# Altium PCB connect.PcbDoc
Units mil, origin at the board's own origin, x right, y up, seen from the top; angles counter-clockwise.
Board outline 322.06 x 417.22 mil, 2 copper layers (Top Layer, Bottom Layer); 2 components, 15 nets, 10 pads, 0 vias.
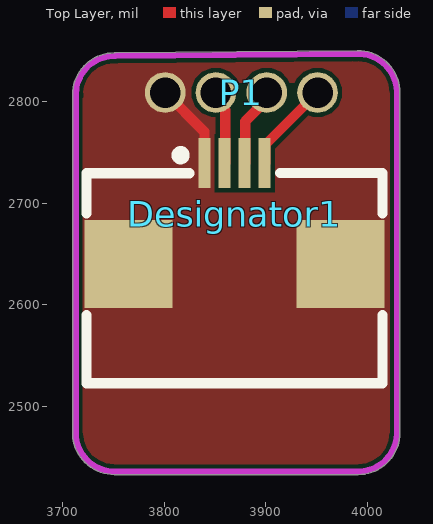
[diagram p0: Top Layer view]
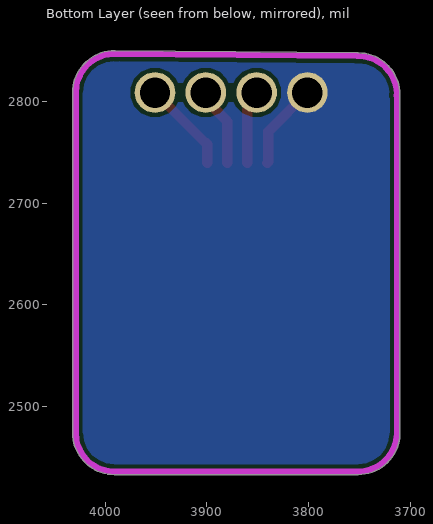
[diagram p1: Bottom Layer view, seen from below]

## Layer stack, top to bottom
Top Solder: solder mask 0.4, Solder Resist, Dk 3.5
Top Layer: signal copper 1.4
Dielectric 1: dielectric 12.6, FR-4, Dk 4.8
Bottom Layer: signal copper 1.4
Bottom Solder: solder mask 0.4, Solder Resist, Dk 3.5

## Board outline
3710.2,2469.85 cw(c3712.99,2471) 3709.97,2471 3709.97,2805 cw(c3712.98,2805) 3710.14,2806 cw(c3712.99,2807) 3709.97,2807 cw(c3751,2807) 3751,2848.03 cw(c3751,2845.01) 3751.49,2847.99 cw(c3751.97,2845.02) 3751.95,2848.03 3990.68,2850.19 cw(c3990.7,2847.95) 3990.71,2850.19 cw(c3990.74,2847.25) 3990.74,2850.19 cw(c3990.74,2808.9) 4032.03,2808.9 4032.03,2474 cw(c3991,2474) 3991,2432.97 3751,2432.97 cw(c3751,2474) 3710.21,2469.52 cw(c3713.22,2469.85)

## Design rules (kind name [scope] priority, off if disabled: settings)
Clearance Clearance_Logo [InNetClass('Logo')] p1: gap=8 ignorepadtopadclearanceinfootprint=FALSE
Clearance [All] p2: gap=4 ignorepadtopadclearanceinfootprint=FALSE except(0: Arc-Hole Track-Hole SMDPad-Hole THPad-Hole Via-Hole Fill-Hole Poly-Hole Region-Hole Text-Hole)
ComponentClearance [All] p1: gap=0 collisioncheckmode=3 verticalgap=0 showdistances=FALSE
DiffPairsRouting [All] p1: maxlimit=9 minlimit=9 mostfreqgap=9 toplayer_minwidth=15 toplayer_maxwidth=15 toplayer_prefwidth=15 bottomlayer_minwidth=15 bottomlayer_maxwidth=15 bottomlayer_prefwidth=15 maxuncoupledlength=500
FanoutControl Fanout_BGA [All] p1: bgadir=Out bgaviamode=Centered fanoutstyle=Auto fanoutdirection=Alternating viagrid=1 // Fanout_BGA (Default Rule)
HoleSize [All] p1: absolutevalues=TRUE maxlimit=10000 minlimit=8 maxpercent=80.000 minpercent=20.000
MinimumSolderMaskSliver [All] p1 off: minsoldermaskwidth=2
PlaneClearance [All] p1: clearance=8
PlaneConnect [All] p1: planeconnectstyle=Direct reliefexpansion=20 reliefentries=4 reliefconductorwidth=10 reliefairgap=10
PolygonConnect [All] p1: connectstyle=Direct reliefconductorwidth=10 reliefentries=4 polygonreliefangle="90 Angle" airgapwidth=10
RoutingVias [All] p1: holewidth=8 width=16 viastyle="Through Hole" minholewidth=6 minwidth=12 maxholewidth=28 maxwidth=50
SilkToSilkClearance [All] p1: silktosilkclearance=0
SilkToSolderMaskClearance [IsPad] p1: minsilkscreentomaskgap=0 clearancetoexposedcopper=TRUE
SolderMaskExpansion [All] p1: expansion=3 istentingtop=FALSE
Width Logo [InNetClass('Logo')] p1: maxlimit=100 minlimit=0.1 preferedwidth=10
Width GND [(InNet('AGND') OR InNet('GND'))] p2: maxlimit=50 minlimit=4 preferedwidth=10
Width VCC [(InNet('VDD_SYS_3.3V') OR InNet('VDD_AV_3.3V') OR InNet('VDD_5V') OR InNet('VDD1V2-SYS') OR InNet('VDD1V1-EPHY') OR InNet('VDD-CPUX') OR InNet('VDD-CPUS') OR InNet('VDD-CPUFB') OR InNet('VCC-DRAM'))] p3: maxlimit=50 minlimit=4 preferedwidth=10
Width [All] p4: maxlimit=10000 minlimit=4 preferedwidth=4
21 further rules are at their usual default settings.

## Components (designator, comment, footprint, x,y, rotation, side; value= is the part's Value field where it differs from the comment)
Designator1 "Comment" FPC-SMD_4P-P0.50_DEALON_0.5K-DX-4PWB 3869.33,2689.7 r0 top
P1 "HDR1x4_1.27" HDR1X4_1.27_180 3801,2809 r90 top

## Footprints (in the part's own frame and the unit in brackets; to place one, negate y for a bottom-side part, rotate by r counter-clockwise, add the part's x,y. Pads: shape width x height; smd on the part's side, far side on the other; paste and mask are expansions set on the pad)
FPC-SMD_4P-P0.50_DEALON_0.5K-DX-4PWB [mm]
  rect 0.3x1.25 smd mask+0.05: 1(-0.75,1.263) 2(-0.25,1.263) 3(0.25,1.263) 4(0.75,1.263)
  rect 2.2x2.2 smd mask+0.05: 5(2.65,-1.263) 6(-2.65,-1.263)
  silkscreen extent -3.7,-4.24 3.7,1.56
HDR1X4_1.27_180 [mil]
  round 40 hole 30 mask+4: 1(0,0) 2(0,-50) 3(0,-100) 4(0,-150)

## Part data
P1: "Header", Add into BOM=yes, Convert to PCB=yes, Device=HDR1x4_1.27, Name=HDR1x4_1.27, Origin Footprint 1=HDR1X4_1.27_180, Origin Footprint 2=HDR1X4_1.27_180F, Origin Footprint 3=HDR1X4_1.27_180H, Origin Footprint 4=HDR1X4_1.27_180HF, Symbol=HDR1x4_1.27

## Nets (pads, with @x,y where several pads share a name; then routed paths per layer and width w, separated by ;. In a path a pad name is that pad's centre, name@x,y a point inside that pad or via, vN(x,y) a via of type N, cw(c..) or ccw(c..) an arc to the next point about the centre after c; other vN are vias at no path point)
ADC_1: 
GND: Designator1.1 Designator1.5 Designator1.6 P1.1 | length 85.6
  Top Layer w10: P1.1 3839.57,2770.43 3839.57,2740.61 Designator1.1@3840.48,2739.7
NetC3_1: 
NetC4_2: 
OUT1_1: 
OUT2_1: 
PWM1_1: 
PWM2_1: 
SCL_1: Designator1.3 P1.3 | length 78.1
  Top Layer w10: Designator1.3@3879.85,2739.7 3879.85,2780.65 3901,2801.81 P1.3
SDA_1: Designator1.4 P1.4 | length 91.1
  Top Layer w10: Designator1.4@3899.53,2739.7 3899.53,2758.41 3900.43,2759.31 3901.31,2759.31 P1.4
SWCLK_1: 
SWDIO_1: 
VCC_3V3: 
VCC_5V: Designator1.2 P1.2 | length 73.1
  Top Layer w10: P1.2 3851,2800.88 3860.16,2791.72 Designator1.2@3860.16,2739.7
VREF: 

## Polygon pours and split planes (outlines as drawn)
GND on Top Layer "GND_L01_P001" (solid, remove dead copper, pour order 1): 3713,2940 4028,2940 4028,2329 3708,2329
GND on Bottom Layer "GND_L02_P000" (solid, remove dead copper, pour order 0): 3717.5,2980.5 4032.5,2980.5 4032.5,2369.5 3712.5,2369.5

## Keep-outs
Keep-Out Layer:
  lines w6: 3712.99,2471 ccw(c3716,2471) 3713.21,2469.85 ccw(c3751,2474) 3751,2435.99 3991,2435.99 ccw(c3991,2474) 4029.01,2474 4029.01,2808.9 ccw(c3990.74,2808.9) 3990.74,2847.18 ccw(c3990.74,2844.16) 3990.71,2847.18 3751.97,2845.01 ccw(c3752,2842) 3751.5,2844.97 ccw(c3751,2842) 3751,2845.01 ccw(c3751,2807) 3712.99,2807 ccw(c3716,2807) 3713.16,2806 ccw(c3716,2805) 3712.99,2805 3712.99,2471

## Silkscreen, mask and mechanical layers (free items; w line width, h text height)
Mechanical 1:
  lines w6: 3712.99,2471 ccw(c3716,2471) 3713.21,2469.85 ccw(c3751,2474) 3751,2435.99 3991,2435.99 ccw(c3991,2474) 4029.01,2474 4029.01,2808.9 ccw(c3990.74,2808.9) 3990.74,2847.18 ccw(c3990.74,2844.16) 3990.71,2847.18 3751.97,2845.01 ccw(c3752,2842) 3751.5,2844.97 ccw(c3751,2842) 3751,2845.01 ccw(c3751,2807) 3712.99,2807 ccw(c3716,2807) 3713.16,2806 ccw(c3716,2805) 3712.99,2805 3712.99,2471